# Altium PCB Glucometer-E.C.- Full V1.1.PcbDoc
Units mm, origin at the board's own origin, x right, y up, seen from the top; angles counter-clockwise.
Board outline 54.25 x 65.25 mm, 2 copper layers (Top Layer, Bottom Layer); 54 components, 58 nets, 244 pads, 35 vias.
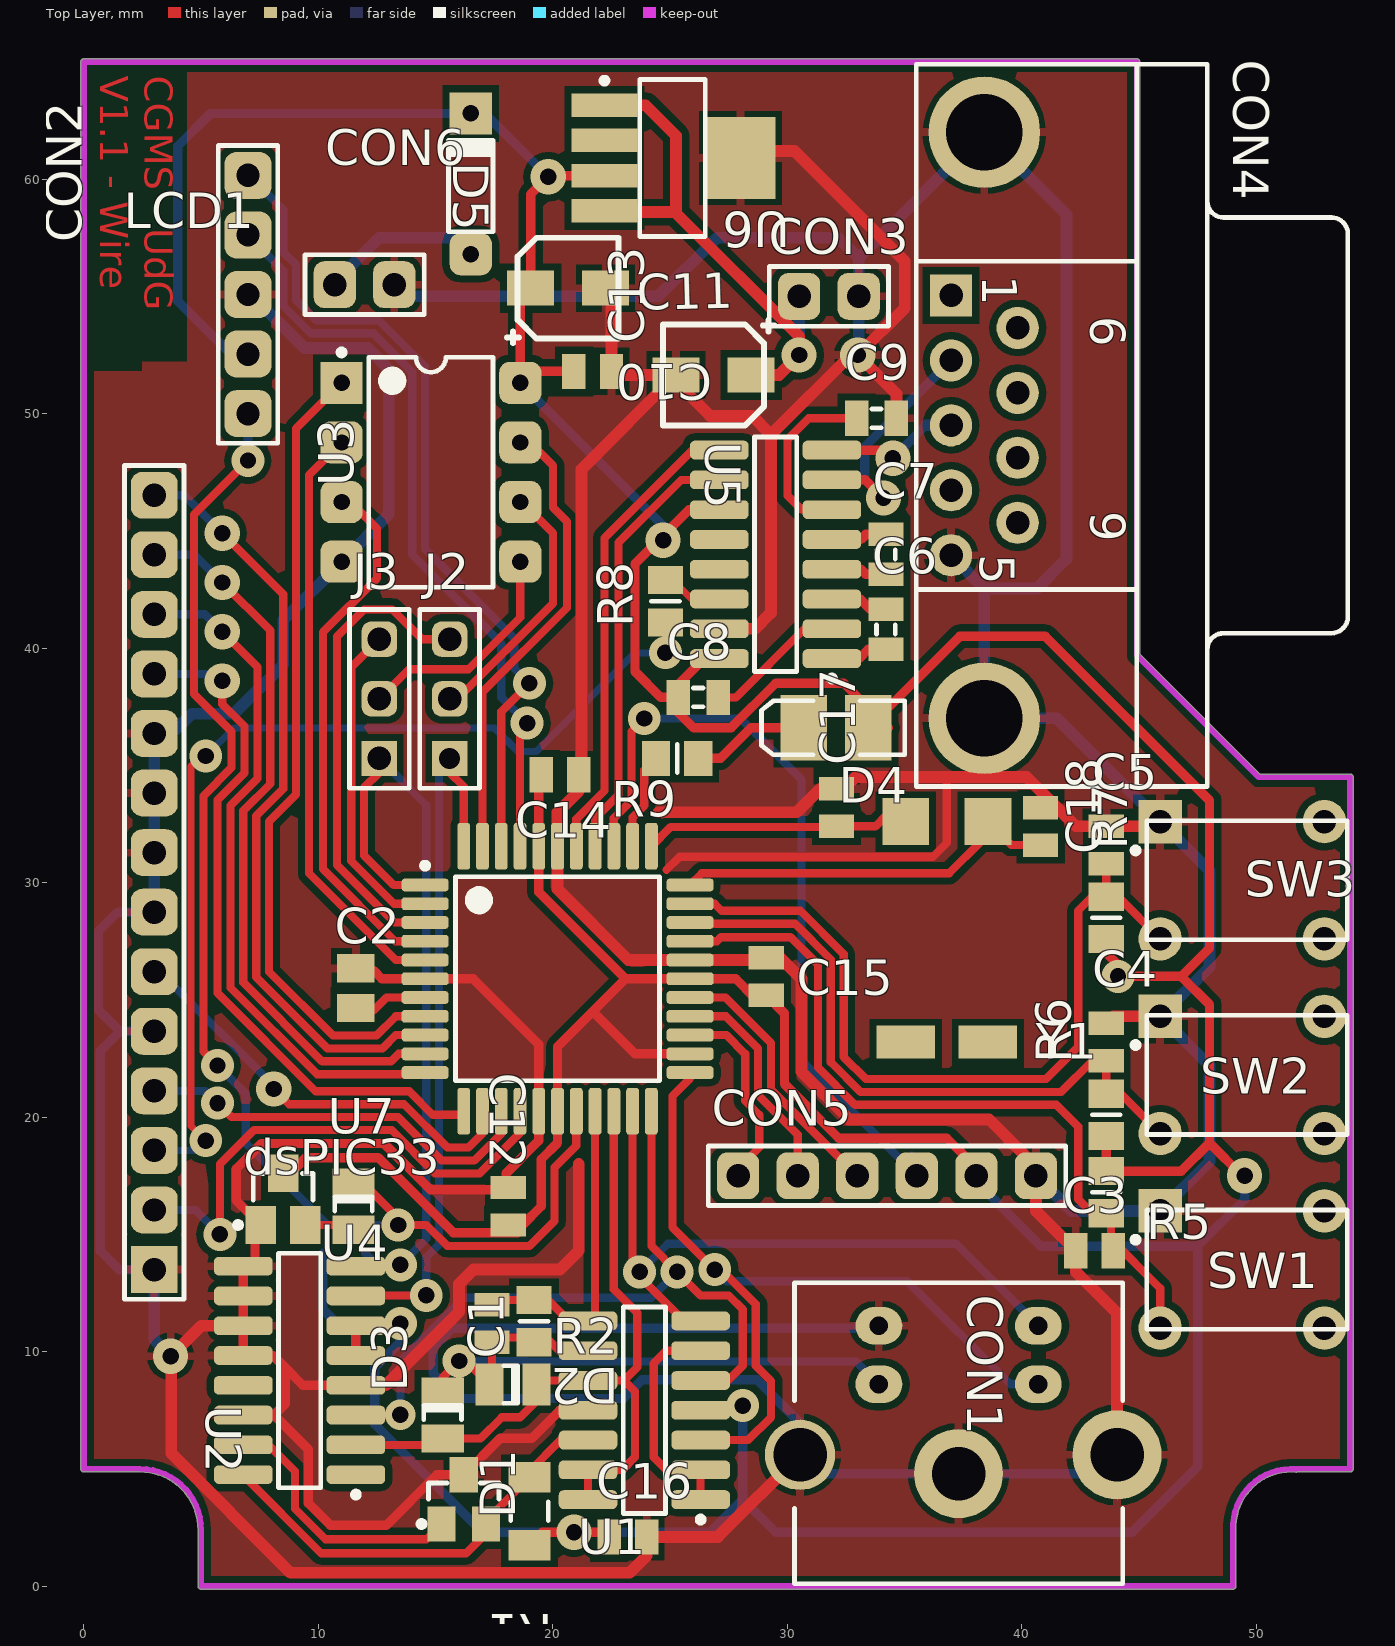
[diagram p0: Top Layer view]
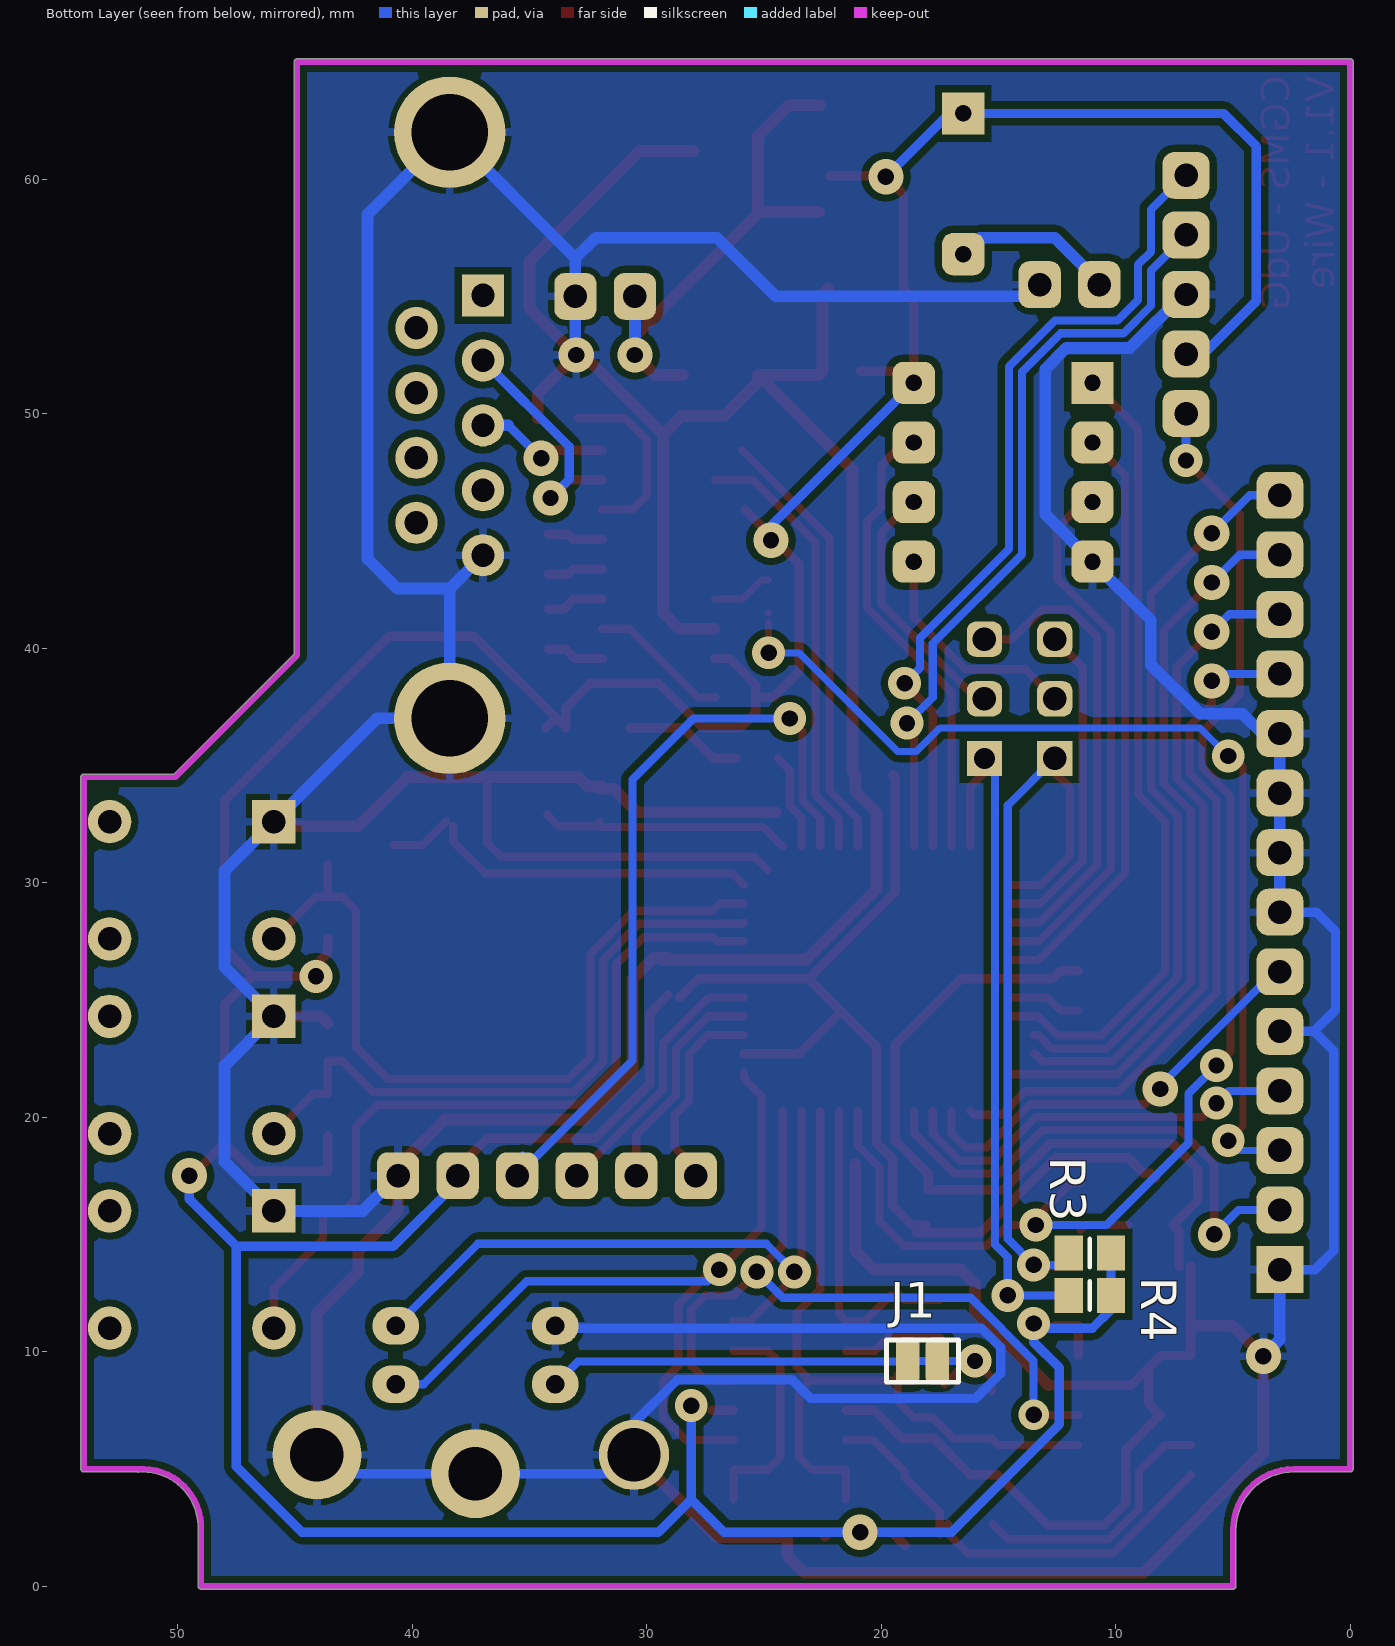
[diagram p1: Bottom Layer view, seen from below]

## Layer stack, top to bottom
Top Layer: signal copper 0.0356
Dielectric: dielectric 0.32, FR-4, Dk 4.8
Bottom Layer: signal copper 0.0356

## Board outline
4.873,0 4.873,2.4 ccw(c2.4,2.4) 2.4,4.873 0,4.873 cw(c0,5) -0.127,5 -0.127,65 cw(c0,65) 0,65.127 44.9,65.127 cw(c44.9,65) 45.027,65 45.027,39.753 50.153,34.627 54,34.627 cw(c54,34.5) 54.127,34.5 54.127,5 cw(c54,5) 54,4.873 51.742,4.873 cw(c51.697,4.992) 51.687,4.865 ccw(c51.498,2.5) 49.127,2.597 49.127,0 cw(c49,0) 49,-0.127 5,-0.127 cw(c5,0)

## Design rules (kind name [scope] priority, off if disabled: settings)
Clearance [All] p1: gap=0.2
PlaneConnect [All] p1: planeconnectstyle=Relief reliefexpansion=0.5 reliefentries=4 reliefconductorwidth=0.3 reliefairgap=0.25
PolygonConnect [All] p1: connectstyle=Relief reliefconductorwidth=0.35 reliefentries=4 polygonreliefangle="90 Angle" airgapwidth=0.25
RoutingVias [All] p1: holewidth=0.7 width=1.5 viastyle="Through Hole" minholewidth=0.6 minwidth=1.27 maxholewidth=1 maxwidth=2
SolderMaskExpansion [All] p1: expansion=0.102
Width [All] p1: maxlimit=5 minlimit=0.25 preferedwidth=0.35 minimp=50.000000 maximp=50.000000 favimp=50.000000
27 further rules are at their usual default settings.

## Components (designator, comment, footprint, x,y, rotation, side; value= is the part's Value field where it differs from the comment)
C1 "Cap2" CAPC1608N 17.4,11.2 r90 top
C2 "Cap" CAPC2012N 11.6,25.5 r270 top
C3 "Cap" CAPC1608N 43.1,14.3 r0 top
C4 "Cap" CAPC1608N 43.6,23.2 r270 top
C5 "Cap" CAPC1608N 43.6,31.6 r270 top
C6 "Cap" RESC1608N 34.2,40.8 r90 top
C7 "Cap" RESC1608N 34.2,44 r90 top
C8 "Cap" RESC1608N 26.2,37.9 r0 top
C9 "Cap" RESC1608N 33.8,49.8 r0 top
C10 "Cap Pol2" C-4x4 24.7,49.5 r0 top
C11 "Cap Pol2" C-4x4 22.8,57.5 r180 top
C12 "Cap" CAPC1608N 18.1,16.2 r270 top
C13 "Cap" CAPC1608N 21.7,51.8 r180 top
C14 "Cap" CAPC1608N 20.3,34.6 r180 top
C15 "Cap" CAPC1608N 29.1,26 r270 top
C16 "Cap" CAPC1608N 23.2,2.1 r180 top
C17 "Cap" CAPC1608N 32.1,33.2 r270 top
C18 "Cap" CAPC1608N 40.8,32.4 r270 top
CON1 "" CDIN2.6-3H4A 37.3,0.1 r90 top
CON2 "Header 5" HDR1X5 7,50 r90 top
CON3 "Header 2" HDR1X2 30.5,55 r0 top
CON4 "D Connector 9" DSUB1.385-2H9 47.9,49.5 r270 top
CON5 "Header 6" HDR1X6 27.9,17.5 r0 top
CON6 "Header 2" HDR1X2 10.7,55.5 r0 top
D1 "1N4148" CD3216-1206#1 15.3,7.4 r90 top
D2 "1N4148" CD3216-1206#2 18.2,8.6 r0 top
D3 "1N4148" CD3216-1206#1 11.5,16.3 r90 top
D4 "LED2" 3.2X1.6X1.1 32.1,36.6 r180 top
D5 "1N4148" DO-35 16.5,59.7 r90 top
dsPIC33 "DSPIC33FJ64MC804-I/PT" TQFP-PT44_N 20.2,25.9 r0 top
J1 "MHDR1X2" MHDR1X2 17.6,9.6 r0 bottom
J2 "Header 3" HDR1X3#1 15.6,35.3 r90 top
J3 "Header 3" HDR1X3#2 12.6,35.3 r90 top
LCD1 "162A" HDR1X14 3,13.5 r90 top locked
R1 "Res1" RESC3216N 19,3.2 r270 top
R2 "Res1" RESC2012N 19.2,11.3 r270 top
R3 "Res1" RESC2012N 11.1,12.4 r0 bottom
R4 "Res1" RESC2012N 11.1,14.2 r0 bottom
R5 "Res1" RESC2012N 43.6,16.8 r90 top
R6 "Res1" RESC2012N 43.6,20.1 r270 top
R7 "Res1" RESC2012N 43.6,28.5 r270 top
R8 "Res1" RESC2012N 24.8,42 r90 top
R9 "Res1" RESC2012N 25.3,35.3 r0 top
SW1 "SW-PB" DPST-4 49.6,13.5 r0 top
SW2 "SW-PB" DPST-4 49.6,21.8 r0 top
SW3 "SW-PB" DPST-4 49.6,30.1 r0 top
U1 "LMC6044IN" M14A_N 23.9,7.5 r180 top
U2 "LM4041CEM3-ADJ/NOPB" MF03A_N 16.2,3.7 r90 top
U3 "24LC1025-E/P" PDIP300-P8 14.8,47.5 r0 top
U4 "AD5242" R-16N_N 9.2,9.2 r180 top
U5 "MAX3232CSE" NSO16_N 29.5,44 r180 top
U6 "LP38693MP-3.3/NOPB" MP05A_N 25.1,60.9 r0 top
U7 "Supply Voltage Supervisor" SOT23 8.5,16.5 r0 top
Y1 "ECS-240-20-7S" ECX-3S 36.8,27.9 r270 top

## Footprints (in the part's own frame and the unit in brackets; to place one, negate y for a bottom-side part, rotate by r counter-clockwise, add the part's x,y. Pads: shape width x height; smd on the part's side, far side on the other; paste and mask are expansions set on the pad)
3.2X1.6X1.1 [mm] "SMT LED; 2 Flat Leads"
  rect 2x2.8 smd: 1(-1.35,0) 2(1.4,0)
  silkscreen extent -2.9,-1.15 3.2,1.15
C-4x4 [mm] "SMD Polar Aluminium Capacitor, 4x4mm, 10V"
  rect 2x1.5 smd: 1(3.75,2.15) 2(0.55,2.15)
  silkscreen extent 0,0 4.75,4.5, body extent 0,0 4.3,4.3, height 5.4
CAPC1608N [mm] "Chip Capacitor, Body 1.6x0.8mm, IPC Medium Density"
  rect 1x1.5 smd: 1(-0.8,0) 2(0.8,0)
  body extent -0.87,-0.48 0.87,0.48, height 0.85
CAPC2012N [mm] "Chip Capacitor, Body 2.0x1.3mm, IPC Medium Density"
  rect 1.2x1.6 smd: 1(-0.85,0) 2(0.85,0)
  body extent -1.1,-0.72 1.1,0.72, height 1.1
CD3216-1206#1 [mm] "Chip Diode; Body 3.2 x 1.6 mm (LxW typ)"
  rect 1.2x1.8 smd: 1(-1.1,0) 2(0.9,0)
  silkscreen extent -0.3,-0.8 0.3,0.8
CD3216-1206#2 [mm] "Chip Diode; Body 3.2 x 1.6 mm (LxW typ)"
  rect 1.2x1.8 smd: 1(-0.9,0) 2(1.1,0)
  silkscreen extent -0.3,-0.8 0.3,0.8
CDIN2.6-3H4A [mm] "Connector; Circular DIN, Thru-Hole; 4 Position; Right Angle; Pitch 2.1/2.6 mm; Body 14 x 12.84 x 13 mm (WxTxH), Shielded, Special PCB Retention"
  oval 1.6x2 hole 0.8: 1(8.51,-3.4) 2(8.51,3.4) 3(11,-3.4) 4(11,3.4)
  round 3.8 hole 2.28: MH1(5.5,-6.76) MH2(4.7,0)
  round 3 hole 2.28: MH3(5.5,6.76)
  silkscreen extent 0,-7 12.84,7, body extent 0,-7 12.84,7, height 13
DO-35 [mm] "Diode, Axial; Body 3.8 x 1.9 mm (LxDia. max), Lead Dia. 0.53 mm (max)"
  rrect50% 1.8x1.8 hole 0.7: 1(-2.9,0)
  rect 1.8x1.8 hole 0.7: 2(3.1,0)
  silkscreen extent -1.95,-0.95 2.05,0.95
DPST-4 [mm] "Switch; 4 Leads"
  rect 1.85x1.85 hole 1: 1(-3.7,2.5)
  round 1.85 hole 1: 2(-3.7,-2.5) 3(3.3,-2.5) 4(3.3,2.5)
  silkscreen extent -4.88,-2.54 4.28,2.54
DSUB1.385-2H9 [mm] "Connector; D Subminiature; 9 Position; Right Angle; Pitch 1.385 mm"
  rect 1.8x1.8 hole 1: 1(-5.54,-10.92)
  round 1.8 hole 1: 2(-2.77,-10.92) 3(0,-10.92) 4(2.77,-10.92) 5(5.54,-10.92) 6(-4.155,-8.08) 7(-1.385,-8.08) 8(1.385,-8.08) 9(4.155,-8.08)
  round 4.76 hole 3.26: 10(-12.495,-9.5) 11(12.495,-9.5)
  silkscreen extent -15.4,-12.4 15.4,6
ECX-3S [mm] "Quartz Crystal, SM; 4 Leads; Body 12.5 x 4.6 x 3.7 mm (LxWxH)"
  rect 2x2 smd: 1(-4.7,-1.75) 4(-4.7,1.75)
  rect 1.4x2.5 smd: 2(4.7,-1.75) 3(4.7,1.75)
HDR1X2 [mm] "Connector; Header; 2 Position"
  rrect50% 1.8x2 hole 1: 1(0,0) 2(2.54,0)
  silkscreen extent -1.27,-1.27 3.81,1.27
HDR1X3#1 [mm] "Connector; Header; 3 Position"
  rect 1.5x1.5 hole 0.9: 1(0,0)
  rrect50% 1.5x1.5 hole 1: 2(2.54,0) 3(5.08,0)
  silkscreen extent -1.27,-1.27 6.35,1.27
HDR1X3#2 [mm] "Connector; Header; 3 Position"
  rect 1.5x1.5 hole 1: 1(0,0)
  rrect50% 1.5x1.5 hole 1: 2(2.54,0) 3(5.08,0)
  silkscreen extent -1.27,-1.27 6.35,1.27
HDR1X5 [mm] "Connector; Header; 5 Position"
  rrect50% 2x2 hole 1: 1(0,0) 2(2.54,0) 3(5.08,0) 4(7.62,0) 5(10.16,0)
  silkscreen extent -1.27,-1.27 11.43,1.27
HDR1X6 [mm] "Connector; Header; 6 Position"
  rrect50% 1.8x2 hole 1: 1(0,0) 2(2.54,0) 3(5.08,0) 4(7.62,0) 5(10.16,0) 6(12.7,0)
  silkscreen extent -1.27,-1.27 13.97,1.27
HDR1X14 [mm] "Connector; Header; 14 Position"
  rect 2x2 hole 1: 1(0,0)
  rrect50% 2x2 hole 1: 2(2.54,0) 3(5.08,0) 4(7.62,0) 5(10.16,0) 6(12.7,0) 7(15.24,0) 8(17.78,0) 9(20.32,0) 10(22.86,0) 11(25.4,0) 12(27.94,0) 13(30.48,0) 14(33.02,0)
  silkscreen extent -1.27,-1.27 34.29,1.27
M14A_N [mm] "SOIC, 14-Leads, Body 8.6x3.9mm, Pitch 1.27mm, IPC Medium Density"
  rrect50% 2.5x0.8 smd: 1(-2.4,3.81) 2(-2.4,2.54) 3(-2.4,1.27) 4(-2.4,0) 5(-2.4,-1.27) 6(-2.4,-2.54) 7(-2.4,-3.81) 8(2.4,-3.81) 9(2.4,-2.54) 10(2.4,-1.27) 11(2.4,0) 12(2.4,1.27) 13(2.4,2.54) 14(2.4,3.81)
  silkscreen extent -2.53,-4.4 0.9,4.78, body extent -2,-4.38 2,4.38, height 1.75
MF03A_N [mm] "SOT23, 3-Leads, Body 2.9x1.3mm, Pitch 0.95mm, Lead Span 2.4mm, IPC Medium Density"
  rect 1.5x1.2 smd: 1(-1.05,0.95) 2(-1.05,-0.95) 3(1.05,0)
  silkscreen extent -1.17,-1.5 0.7,1.92, body extent -0.7,-1.5 0.7,1.5, height 1.12
MHDR1X2 [mm] "Connector; Header; 2 Position"
  rrect50% 1x2 smd: 1(0,0) 2(1.27,0)
  silkscreen extent -0.9,-0.9 2.17,0.9
MP05A_N [mm] "SOT223, 5-Leads, Body 6.5x3.5mm, Pitch 1.5mm, Lead Span 7mm, IPC Medium Density"
  rect 2.8x1 smd: 1(-2.9,2.25) 2(-2.9,0.75) 3(-2.9,-0.75) 4(-2.9,-2.25)
  rect 3x3.5 smd: 5(2.9,0)
  silkscreen extent -3.02,-3.35 1.4,3.42, body extent -1.85,-3.35 1.85,3.35, height 1.8
NSO16_N [mm] "SOIC, 16-Leads, Body 9.9x3.9mm, Pitch 1.27mm, IPC Medium Density"
  rrect50% 2.5x0.8 smd: 1(-2.4,4.445) 2(-2.4,3.175) 3(-2.4,1.905) 4(-2.4,0.635) 5(-2.4,-0.635) 6(-2.4,-1.905) 7(-2.4,-3.175) 8(-2.4,-4.445) 9(2.4,-4.445) 10(2.4,-3.175) 11(2.4,-1.905) 12(2.4,-0.635) 13(2.4,0.635) 14(2.4,1.905) 15(2.4,3.175) 16(2.4,4.445)
  silkscreen extent -2.53,-5 0.9,5.42, body extent -2,-5 2,5, height 1.75
PDIP300-P8 [mm] "DIP, 8-Leads, Row Spacing 7.62mm, Pitch 2.54mm, Body 9.5x6.6mm"
  rect 1.8x1.8 hole 0.7: 1(-3.81,3.81)
  rrect50% 1.8x1.8 hole 0.7: 2(-3.81,1.27) 3(-3.81,-1.27) 4(-3.81,-3.81) 5(3.81,-3.81) 6(3.81,-1.27) 7(3.81,1.27) 8(3.81,3.81)
  silkscreen extent -3.93,-4.9 2.65,5.23, body extent -3.55,-4.9 3.55,4.9, height 5.34
R-16N_N [mm] "16-Pin Small Outline Integrated Circuit 1.27 mm Pitch, IPC Medium Density"
  rrect50% 2.5x0.8 smd: 1(-2.4,4.445) 2(-2.4,3.175) 3(-2.4,1.905) 4(-2.4,0.635) 5(-2.4,-0.635) 6(-2.4,-1.905) 7(-2.4,-3.175) 8(-2.4,-4.445) 9(2.4,-4.445) 10(2.4,-3.175) 11(2.4,-1.905) 12(2.4,-0.635) 13(2.4,0.635) 14(2.4,1.905) 15(2.4,3.175) 16(2.4,4.445)
  silkscreen extent -2.53,-5 0.9,5.42, body extent -1.95,-4.95 1.95,4.95, height 1.75
RESC1608N [mm] "Chip Resistor, Body 1.6x0.8mm, IPC Medium Density"
  rect 1x1.5 smd: 1(-0.85,0) 2(0.85,0)
  silkscreen extent -0.2,-0.4 0.2,0.4, body extent -0.85,-0.48 0.85,0.48, height 0.6
RESC2012N [mm] "Chip Resistor, Body 2.0x1.3mm, IPC Medium Density"
  rect 1.2x1.5 smd: 1(-0.9,0) 2(0.9,0)
  silkscreen extent 0,-0.6 0,0.6, body extent -1.07,-0.7 1.07,0.7, height 0.65
RESC3216N [mm] "Chip Resistor, Body 3.2x1.6mm, IPC Medium Density"
  rect 1.3x1.8 smd: 1(-1.45,0) 2(1.45,0)
  silkscreen extent -0.4,-0.8 0.4,0.8, body extent -1.68,-0.87 1.68,0.87, height 0.71
SOT23 [mm] "SOT-23; 3 Leads; Body 3.0 x 2.6 mm, inc. leads (LxW max)"
  rect 1.3x1.6 smd: 1(-0.95,-1.1) 2(0.95,-1.1) 3(0,1.1)
  silkscreen extent -2.05,-1.22 1.28,1.1
TQFP-PT44_N [mm] "Thin QFP, 44-Leads, Body 10x10mm, Pitch 0.8mm, IPC Medium Density"
  rrect50% 2x0.55 smd: 1(-5.65,4) 2(-5.65,3.2) 3(-5.65,2.4) 4(-5.65,1.6) 5(-5.65,0.8) 6(-5.65,0) 7(-5.65,-0.8) 8(-5.65,-1.6) 9(-5.65,-2.4) 10(-5.65,-3.2) 11(-5.65,-4) 23(5.65,-4) 24(5.65,-3.2) 25(5.65,-2.4) 26(5.65,-1.6) 27(5.65,-0.8) 28(5.65,0) 29(5.65,0.8) 30(5.65,1.6) 31(5.65,2.4) 32(5.65,3.2) 33(5.65,4)
  rrect50% 0.55x2 smd: 12(-4,-5.65) 13(-3.2,-5.65) 14(-2.4,-5.65) 15(-1.6,-5.65) 16(-0.8,-5.65) 17(0,-5.65) 18(0.8,-5.65) 19(1.6,-5.65) 20(2.4,-5.65) 21(3.2,-5.65) 22(4,-5.65) 34(4,5.65) 35(3.2,5.65) 36(2.4,5.65) 37(1.6,5.65) 38(0.8,5.65) 39(0,5.65) 40(-0.8,5.65) 41(-1.6,5.65) 42(-2.4,5.65) 43(-3.2,5.65) 44(-4,5.65)
  silkscreen extent -5.77,-4.35 4.35,4.95, body extent -5,-5 5,5, height 1.2

## Part data
C1 C2 C3 C4 C5 C6 C7 C8 C9 C12 C13 C14 C15 C16 C17 C18: "Capacitor"
C10 C11: "Polarized Capacitor (Axial)"
CON1: library part "MiniDin 4Pins - SuperVideo", "MiniDin 4 Pins"
CON2: "Header, 5-Pin"
CON3 CON6 J1: "Header, 2-Pin"
CON4: "Receptacle Assembly, 9 Position, Right Angle"
CON5: "Header, 6-Pin"
D1 D2 D3 D5: "High Conductance Fast Diode"
D4: "Typical RED, GREEN, YELLOW, AMBER GaAs LED"
dsPIC33: "High-Performance 16-bit Digital Signal Controller, 64 KB Flash, 16 KB RAM, 44-Pin TQFP, Industrial Temperature"
J2 J3: "Header, 3-Pin"
LCD1: "16 char * 2 line LCD character display with b/light"
R1 R2 R3 R4 R5 R6 R7 R8 R9: "Resistor"
SW1 SW2 SW3: "Switch"
U1: "CMOS Quad Micropower Operational Amplifier, 14-pin MDIP"
U2: "Precision Micropower Shunt Voltage Reference, 3-pin SOT-23, Pb-Free"
U3: "1 Mbit, 400kHz, 2.5V, I2C Serial EEPROM, 8-Pin PDIP, Extended Temperature"
U4: "AD5242BR"
U5: "3.0V TO 5.5V, Low-Power, up to 1Mbps, True RS-232 Transceiver Using Four 0.1µF External Capacitor"
U6: "500mA Low Dropout CMOS Linear Regulators Stable with Ceramic Output Capacitors, 5-pin SOT-223, Pb-Free"
Y1: "Crystal Oscillator"

## Via types
v1: diameter 1.4, hole 0.7, Top Layer to Bottom Layer, 19 vias
v2: diameter 1.5, hole 0.7, Top Layer to Bottom Layer, 14 vias
v3: diameter 1.3, hole 0.7, Top Layer to Bottom Layer, 1 vias
v4: diameter 1.4, hole 0.7, Top Layer to Bottom Layer, tented bottom, 1 vias

## Nets (pads, with @x,y where several pads share a name; then routed paths per layer and width w, separated by ;. In a path a pad name is that pad's centre, name@x,y a point inside that pad or via, vN(x,y) a via of type N, cw(c..) or ccw(c..) an arc to the next point about the centre after c; other vN are vias at no path point)
3.3V: C8.1 C11.1 C12.2 C13.2 C14.2 C15.2 C16.2 CON2.2 CON5.5 D4.1 D5.2 dsPIC33.17 dsPIC33.24 dsPIC33.28 dsPIC33.40 R1.2 R3.1 R4.1 R5.2 R6.2 R7.2 U1.4 U3.8 U4.5 U4.6 U5.11 U5.16 U6.3 U7.3 | length 269.8
  Top Layer w0.4: U7.3@8.3,17.4 U7.3 8.8,17.6 9.475,18.275 12.556,18.275 15.756,15.075 C12.2@18.5,15.075 ; U4.5 U4.6 U4.6@12.605,11.105 ; C12.2 18.7,15.4 19.5,16.2 19.5,18.2 20.2,18.9 dsPIC33.17 20.2,23 21.7,24.5 ; R1.2 19.55,2.3 v2(20.9,2.3) 22.2,2.3 C16.2 ; C14.2 19.4,34.5 dsPIC33.40 19.4,29.6 23.1,25.9 ; C13.2 19.1,51.8 U3.8 18.61,54.91 C11.1 19.05,59.35 v2(19.8,60.1) 19.85,60.15 U6.3 ; v2@24.6,44.7 25.805,45.905 ; v2(24.7,44.6) 24.5,44.6 23.5,43.6 23.5,39 24.6,37.9 C8.1 ; dsPIC33.24 23.5,22.7 21.7,24.5 ; U1.4 U1.4@27.2,7.5 ; U5.16 26.455,39.555 25.35,38.45 C8.1 ; C15.2@28.6,25.1 27.8,25.9 dsPIC33.28 23.1,25.9 ; C15.2 29.875,24.425 29.875,21.418 32.193,19.1 36.8,19.1 37.56,18.34 CON5.5@37.56,17.5 ; D4.1@33.875,37.025 D4.1@34.3,36.6 ; CON5.5@38.06,16.724 CON5.5 ; R6.2 R5.2 46.8,17.7 48,18.9 ; R7.2 43.6,27 44.6,26 46.8,26 ; v1@44.4,25.7 v1@44.7,26 ; v2(49.5,17.5) 49.4,17.5 48,18.9 ; 21.7,24.5 23.1,25.9 ; C8.1 25.35,37.25 26,36.6 27.6,36.6 29.5,38.5 32.4,38.5 33.45,37.45 D4.1 37.35,40.5 41,40.5 48,33.5 48,27.2 46.8,26 ; 46.8,26 48,24.8 48,18.9
  Bottom Layer w0.4: CON2.2 6.26,52.54 4,54.8 4,61.4 5.4,62.8 D5.2 17.1,62.8 v2(19.8,60.1) ; R4.1 R3.1 10.2,11.8 11,11 13.3,11 v1(13.5,11.2) 13.5,10.413 12.4,9.313 12.4,6.9 17,2.3 v2(20.9,2.3) 26.7,2.3 28.1,3.7 ; U3.8 24.7,45.22 v2(24.7,44.6) ; v4(28.1,7.7) 28.1,3.7 ; CON5.5@37.56,17.26 CON5.5@37.56,17.5 ; CON5.5 38.06,17.24 40.8,14.5 47.5,14.5 ; v2(49.5,17.5) 49.5,16.5 47.5,14.5 ; 28.1,3.7 29.5,2.3 44.7,2.3 47.5,5.1 47.5,14.5
  other v1: 44.1,26
-V: R8.2 U5.14 | length 2.6
  Top Layer w0.3: R8.2 25.1,42.9 25.905,42.095 U5.14
BTN_D: C5.2 dsPIC33.32 R7.1 SW3.2 | length 34.5
  Top Layer w0.35: dsPIC33.32 26.9,29.1 27.2,28.8 30.556,28.8 32.4,26.956 32.4,22.572 33.347,21.625 41.025,21.625 42.4,23 42.4,28.8 43,29.4 R7.1 ; C5.2 R7.1 ; SW3.2 44.1,29.4 R7.1
BTN_E: C4.2 dsPIC33.31 R6.1 SW2.2 | length 28.3
  Top Layer w0.35: dsPIC33.31 25.9,28.25 30.328,28.25 31.85,26.728 31.85,22.344 33.119,21.075 41.675,21.075 43,22.4 C4.2 R6.1 44.2,21 SW2.2
BTN_U: C3.2 dsPIC33.30 R5.1 SW1.2 | length 32.9
  Top Layer w0.35: dsPIC33.30 27,27.5 27.175,27.675 30.125,27.675 31.3,26.5 31.3,22.116 32.891,20.525 41.475,20.525 42.4,19.6 42.4,16.5 43,15.9 R5.1 43.8,15.7 43.8,14.8 45.9,12.7 SW1.2
CNT: CON1.3 dsPIC33.21 U1.7 | length 29.8
  Top Layer w0.35: v1@23.4,13.5 dsPIC33.21 ; v1@23.6,13.3 v1@24,12.9 ; v1(23.7,13.4) 23.7,13.2 25.59,11.31 U1.7
  Bottom Layer w0.35: v1(23.7,13.4) 24.9,14.6 37.2,14.6 CON1.3
DB4: dsPIC33.12 LCD1.11 | length 29.5
  Top Layer w0.35: v2(5.9,38.6) 5.9,37.618 6.85,36.668 6.85,34.672 5.7,33.522 5.7,25.289 9.889,21.1 13.878,21.1 14.878,20.1 16.05,20.1 dsPIC33.12
  Bottom Layer w0.35: LCD1.11 v2@5.6,38.9
DB5: dsPIC33.11 LCD1.12 | length 29.3
  Top Layer w0.35: v2(5.9,40.7) 7.4,39.2 7.4,34.444 6.25,33.294 6.25,25.517 9.937,21.83 14.48,21.83 dsPIC33.11
  Bottom Layer w0.35: LCD1.12 5.16,41.44 v2(5.9,40.7)
DB6: dsPIC33.10 LCD1.13 | length 30
  Top Layer w0.35: v2(5.9,42.8) 7.95,40.75 7.95,34.217 6.8,33.067 6.8,25.744 10.164,22.38 13.102,22.38 13.422,22.7 13.5,22.7
  Bottom Layer w0.35: LCD1.13 4.72,43.98 v2(5.9,42.8)
DB7: dsPIC33.9 LCD1.14 | length 31.7
  Top Layer w0.35: v2(5.9,44.9) 8.5,42.3 8.5,33.989 7.35,32.839 7.35,25.972 10.392,22.93 12.73,22.93 13.3,23.5 13.5,23.5
  Bottom Layer w0.35: LCD1.14 4.28,46.52 v2(5.9,44.9)
E: dsPIC33.13 LCD1.6 | length 18.4
  Top Layer w0.35: v2(8.1,21.2) 8.75,20.55 13.65,20.55 15.5,18.7 16.4,18.7 17,19.3 dsPIC33.13
  Bottom Layer w0.35: LCD1.6 3.22,26.2 8.1,21.32 v2(8.1,21.2)
EXTP1: dsPIC33.8 U3.1 | length 34.5
  Top Layer w0.35: U3.1 9.05,49.37 9.05,33.761 7.9,32.611 7.9,26.2 10.62,23.48 12.48,23.48 13.3,24.3 dsPIC33.8
EXTP2: dsPIC33.5 U3.2 | length 25.4
  Top Layer w0.35: U3.2 9.6,47.38 9.6,30.4 13.3,26.7 dsPIC33.5
EXTP3: dsPIC33.4 U3.3 | length 23.1
  Top Layer w0.35: U3.3 11.37,46.23 12.5,45.1 12.5,42.978 10.2,40.678 10.2,30.578 13.278,27.5 dsPIC33.4
EXTP4: dsPIC33.43 U3.7 | length 19.1
  Top Layer w0.35: dsPIC33.43 17,38.122 20.6,41.722 20.6,45.4 20,46 20,47.78 U3.7@19.21,48.57
EXTP5: dsPIC33.3 J2.3 | length 20.3
  Top Layer w0.35: dsPIC33.3 13.256,28.3 10.8,30.756 10.8,40.5 11.95,41.65 13.15,41.65 14.42,40.38 J2.3
EXTP6: dsPIC33.2 J3.3 | length 13.9
  Top Layer w0.35: J3.3 11.4,39.18 11.4,30.933 13.233,29.1 dsPIC33.2
GND: C2.1 C3.1 C4.1 C5.1 C9.2 C10.2 C11.2 C12.1 C13.1 C14.1 C15.1 C16.1 C17.1 C18.1 CON1.4 CON1.MH1 CON1.MH2 CON1.MH3 CON2.3 CON3.2 CON4.5 CON4.10 CON4.11 CON5.6 CON6.2 dsPIC33.6 dsPIC33.16 dsPIC33.29 dsPIC33.39 LCD1.1 LCD1.5 LCD1.7 LCD1.8 LCD1.9 LCD1.10 SW1.1 SW2.1 SW3.1 U1.11 U2.3 U3.4 U4.4 U4.9 U4.10 U4.11 U4.12 U4.14 U5.15 U6.5 U7.1 | length 482.9
  Top Layer w0.3: SW1.1@46,15.5 SW1.1@46.5,16 ; SW2.1@46.4,24.1 SW2.1@46.5,24.1
  Top Layer w0.35: 24.85,30.55 25.4,31.1 36.2,31.1 36.8,31.7 36.8,34.5
  Top Layer w0.4: U4.9 U4.10 U4.11 U4.12 8.065,9.835 8.6,9.3 ; U4.9@7.3,13.645 7.3,15.15 U7.1 6.5,16.45 6.5,17.8 7.575,18.875 12.805,18.875 14.78,16.9 18,16.9 18,17.6 19.4,19 dsPIC33.16 19.4,23.1 16.6,25.9 dsPIC33.6 12.7,25.9 12.35,26.25 C2.1@11.6,26.25 ; 12.865,8.565 U4.4 9.335,8.565 8.6,9.3 ; U1.11 20.3,7.5 19.1,6.3 17.75,6.3 U2.3 15.05,4.75 12.9,2.6 10.513,2.6 9.575,3.538 9.575,5.825 8.105,7.295 8.6,7.79 8.6,9.3
  Top Layer w0.5: v2(3.7,9.8) 3.722,9.778 3.722,5.663 8.809,0.577 23.277,0.577 24,1.3 C16.1 27.04,2.1 CON1.MH3 ; v2@3.722,9.8 3.722,9.822 5.005,11.105 U4.11 ; 12.865,8.565 16,11.7 16,12.9 16.6,13.5 20.3,13.5 21.1,14.3 21.1,18 ; C11.2 22.5,55.1 C13.1 22.65,51.65 C10.2 ; 24.5,33 30.4,33 31.4,34 C17.1@32,34 ; U5.15 28.625,40.825 29.3,41.5 29.3,49.1 ; U6.5@28,61.2 30.3,61.2 35,56.5 35,54.5 v2(33,52.5) ; C15.1 29.7,26.8 30.6,25.9 30.6,21.932 32.632,19.9 38.6,19.9 40.1,18.4 CON5.6@40.1,17.5 ; C15.1@29.3,26.7 dsPIC33.29 23.219,26.7 20.2,29.719 dsPIC33.39 20.2,33 21.1,33.9 C14.1 21.225,34.725 21.225,47.625 C10.2 ; C17.1@31.9,34.1 32.5,34.1 32.9,34.5 36.8,34.5 40.2,34.5 42.3,32.4 C5.1 45.7,32.4 SW3.1 ; C9.2 34.65,50.85 v2(33,52.5) ; CON5.6 40.6,16 C3.1 42.3,13.4 44.06,11.64 CON1.MH1 ; C4.1 43.9,24.3 SW2.1 ; C10.2 25.25,51.35 26.7,49.9 28.5,49.9 29.3,49.1 ; 29.3,49.1 32.7,52.5 v2(33,52.5)
  Bottom Layer w0.4: LCD1.1 1.5,13.5 0.7,14.3 0.7,22.82 1.54,23.66 ; LCD1.5 1.54,23.66 ; LCD1.7 1.44,28.74 0.627,27.927 0.627,24.573 1.54,23.66 ; CON1.4 33.8,11 15.72,11 14.9,10.18 14.9,9.08 15.98,8 23,8 23.8,8.8 28.7,8.8 30.54,6.96 CON1.MH3 31.34,4.8 CON1.MH2 CON1.MH1@43.26,4.8
  Bottom Layer w0.5: LCD1.1 3,10.5 v2(3.7,9.8) ; LCD1.7 LCD1.8 LCD1.9 LCD1.10 3.76,36.36 4.6,37.2 6.4,37.2 8.5,39.3 8.5,41.2 U3.4 13,45.7 13,51.9 12.1,52.8 9.4,52.8 CON2.3@7,55.2 ; CON6.2 13.74,55 24.5,55 27,57.5 32.175,57.5 33.04,56.635 ; v2@33.04,52.54 CON3.2 33.04,56.635 ; CON4.5 38.4,42.54 ; CON5.6 42.1,16 SW1.1 48,18.1 48,22.2 SW2.1 48,26.4 48,30.5 41.495,37.005 CON4.11 38.4,42.54 ; 33.04,56.635 CON4.10 41.9,58.495 41.9,43.8 40.64,42.54 38.4,42.54
LCDVDD: dsPIC33.15 LCD1.2 | length 22
  Top Layer w0.35: v1(5.8,15) 5.8,18 7.25,19.45 13.13,19.45 14.98,17.6 16.878,17.6 18.6,19.322 dsPIC33.15
  Bottom Layer w0.35: LCD1.2 4.76,16.04 v1(5.8,15)
LCDVO: LCD1.3 R8.1 | length 43
  Top Layer w0.3: LCD1.3 LCD1.3@3.03,18.55 ; v1(5.2,19) 4.575,19.625 4.575,34.975 5,35.4 v1(5.2,35.4) ; v1(24.8,39.8) R8.1
  Bottom Layer w0.3: LCD1.3 4.78,18.58 v1(5.2,19) ; v1(5.2,35.4) 6.4,36.6 17.5,36.6 18.5,35.6 19.3,35.6 23.5,39.8 v1(24.8,39.8)
LED1: dsPIC33.35 R9.1 | length 4.2
  Top Layer w0.35: dsPIC33.35 23.4,32.784 23.9,33.284 23.9,34.8 R9.1
MCLR: CON2.1 D3.2 dsPIC33.18 | length 57.3
  Top Layer w0.35: v1(5.7,22.2) 5.1,22.8 5.1,33.7 6.3,34.9 6.3,36.44 4.7,38.04 4.7,45.7 v1(7,48) ; D3.2 11.9,17.2 13.4,15.7 v1(13.4,15.4) 14.6,15.4 15.5,14.5 19,14.5 20.075,15.575 20.075,17.859 21,18.784 dsPIC33.18
  Bottom Layer w0.35: v1(5.7,22.2) 6.9,21 6.9,18.9 10.4,15.4 v1(13.4,15.4)
  Bottom Layer w0.4: v1(7,48) CON2.1
NetC2_2: C2.2 dsPIC33.7 | length 3.2
  Top Layer w0.35: C2.2@11.6,24.55 12.35,24.55 12.9,25.1 dsPIC33.7
NetC6_1: C6.1 U5.1 | length 2.5
  Top Layer w0.4: U5.1 33.055,39.555 33.45,39.95 C6.1
NetC6_2: C6.2 U5.3 | length 2.5
  Top Layer w0.4: U5.3 33.105,42.095 33.55,41.65 C6.2
NetC7_1: C7.1 U5.4 | length 2.4
  Top Layer w0.4: U5.4 33.135,43.365 33.35,43.15 C7.1
NetC7_2: C7.2 U5.5 | length 2.4
  Top Layer w0.4: U5.5 33.135,44.635 33.35,44.85 C7.2
NetC8_2: C8.2 U5.2 | length 6.1
  Top Layer w0.35: C8.2 27.8,37.9 30.725,40.825 U5.2
NetC9_1: C9.1 U5.6 | length 7.9
  Top Layer w0.35: U5.6 30.595,45.905 30,46.5 30,48.9 30.9,49.8 C9.1
NetCON5_1: CON5.1 dsPIC33.25 | length 8.5
  Top Layer w0.35: dsPIC33.25 27.4,23.5 28.2,22.7 28.2,20.7 28.8,20.1 28.8,18.7 27.9,17.8 CON5.1
NetCON5_2: CON5.2 dsPIC33.26 | length 9.8
  Top Layer w0.35: dsPIC33.26 27.378,24.3 28.75,22.928 28.75,20.95 30.44,19.26 30.44,18 CON5.2@29.94,17.5
NetCON5_3: CON5.3 dsPIC33.27 | length 12.1
  Top Layer w0.35: dsPIC33.27 27.356,25.1 29.3,23.156 29.3,21.18 CON5.3@32.48,18 ; CON5.3@32.48,17.5 CON5.3@32.48,18 ; CON5.3@32.48,18.12 CON5.3@32.48,18 ; CON5.3 CON5.3@32.48,18
NetCON5_4: CON5.4 dsPIC33.36 | length 33.7
  Top Layer w0.35: dsPIC33.36 22.6,32.762 23.35,33.512 23.35,36.45 v1(23.9,37)
  Bottom Layer w0.35: v1(23.9,37) 28,37 30.6,34.4 30.6,22.42 CON5.4@35.02,18 ; CON5.4@35.02,17.5 CON5.4@35.02,18 ; CON5.4@35.3,18.36 35.02,18.08 CON5.4@35.02,18 ; CON5.4 CON5.4@35.02,18
NetCON6_1: CON6.1 D5.1 | length 7
  Bottom Layer w0.5: CON6.1 10.7,55.6 12.6,57.5 15.8,57.5 D5.1
NetD3_1: D3.1 U7.2 | length 2.1
  Top Layer w0.35: U7.2 11.3,15.4 D3.1
NetD4_2: D4.2 R9.2 | length 5
  Top Layer w0.4: R9.2 27.149,35.3 28.449,36.6 D4.2
NetU1_1: U1.1 U1.2 U1.6 | length 9.7
  Top Layer w0.35: U1.1 U1.2 24.84,4.96 24.3,5.5 24.3,9.5 24.84,10.04 U1.6
PEGC: CON2.5 dsPIC33.42 | length 35.7
  Top Layer w0.35: dsPIC33.42 17.8,37.3 v1(19,38.5)
  Bottom Layer w0.35: CON2.5@7,60.2 8.5,58.7 8.5,56.9 9.05,56.35 9.05,54.85 9.925,53.975 12.587,53.975 14.55,52.012 14.55,44.228 18.35,40.428 18.35,39.15 v1(19,38.5)
PEGD: CON2.4 dsPIC33.41 | length 32.7
  Top Layer w0.35: dsPIC33.41 18.6,36.5 v1(18.9,36.8)
  Bottom Layer w0.35: CON2.4@7,57.6 8.5,56.1 8.5,54.6 9.675,53.425 12.359,53.425 14,51.784 14,44 17.8,40.2 17.8,37.9 v1(18.9,36.8) ; v1@19.15,36.55 v1@19.2,36.6
REF: CON1.1 dsPIC33.23 U1.3 | length 36.1
  Top Layer w0.35: dsPIC33.23 25.85,21.65 25.1,20.9 25.1,15.3 v1(26.9,13.5) 27.178,13.5 28.65,12.028 28.65,9.4 29.3,8.75 29.3,7.2 28.33,6.23 U1.3
  Bottom Layer w0.35: v1(26.9,13.5) 27.4,13 35.12,13 39.51,8.61 CON1.1
RS: dsPIC33.14 LCD1.4 | length 17.5
  Top Layer w0.35: v1(5.7,20.6) 6.3,20 13.394,20 15.244,18.15 16.65,18.15 17.8,19.3 dsPIC33.14
  Bottom Layer w0.35: LCD1.4 5.18,21.12 v1(5.7,20.6)
RXD: CON4.2 U5.7 | length 10.2
  Top Layer w0.4: U5.7 33.325,47.175 v2(34.1,46.4)
  Bottom Layer w0.4: v2(34.1,46.4) 33.3,47.2 33.3,48.59 CON4.2
SCL1: dsPIC33.44 J2.1 R3.2 U4.7 | length 32.9
  Top Layer w0.35: U4.7 11.625,12.4 v1(14.6,12.4) ; J2.1 15.6,34.7 16.2,34.1 dsPIC33.44
  Bottom Layer w0.35: R3.2 v1(14.6,12.4) 14.6,14.022 15.15,14.572 15.15,34.85 J2.1
SCL1-M: J2.2 U3.6 | length 10.5
  Top Layer w0.35: J2.2 15.94,37.84 20,41.9 20,44.9 19.21,45.69 U3.6@19.21,46.03
SDA1: dsPIC33.1 J3.1 R4.2 U4.8 | length 34
  Top Layer w0.35: U4.8 13.445,13.645 v1(13.5,13.7) ; J3.1 12.6,34.7 11.95,34.05 11.95,31.161 13.211,29.9 dsPIC33.1
  Bottom Layer w0.35: R4.2 12.5,13.7 v1(13.5,13.7) 14.6,14.8 14.6,33.3 J3.1
SDA1-M: J3.2 U3.5 | length 9.9
  Top Layer w0.35: J3.2 13.86,39.1 16.4,39.1 18.61,41.31 18.61,42.89 U3.5@19.21,43.49
SOSCI: C18.2 dsPIC33.33 Y1.4 | length 16.5
  Top Layer w0.35: dsPIC33.33 26.35,30.4 36.9,30.4 38.25,31.75 Y1.4@38.25,32.4 ; Y1.4 39.55,31.6 C18.2
SOSCO: C17.2 dsPIC33.34 Y1.1 | length 10.7
  Top Layer w0.35: dsPIC33.34 25.025,32.375 31.975,32.375 C17.2@32,32.4 ; C17.2@32,32.6 32.2,32.4 33.75,32.4 Y1.1@34.25,32.9
TXD: CON4.3 U5.8 | length 5.8
  Top Layer w0.3: v2@34.155,48.445 v2(34.5,48.1)
  Top Layer w0.4: U5.8 v2@34.155,48.445
  Bottom Layer w0.4: v2(34.5,48.1) 35.9,49.5
  Bottom Layer w0.5: 35.9,49.5 CON4.3
U1RX: dsPIC33.38 U5.9 | length 18.9
  Top Layer w0.35: dsPIC33.38 21,32.717 22.2,33.917 22.2,44.7 U5.9@25.945,48.445
U1TX: dsPIC33.37 U5.10 | length 18.8
  Top Layer w0.35: dsPIC33.37 21.8,32.74 22.8,33.74 22.8,44.5 25.475,47.175 U5.10
VCTRL: dsPIC33.22 U1.5 U4.3 | length 32.8
  Top Layer w0.35: U4.3 13.495,7.295 v3(13.5,7.3) ; dsPIC33.22 24.2,14.5 v1(25.3,13.4) 26.3,12.4 27.5,12.4 28.1,11.8 28.1,9.4 27.47,8.77 U1.5
  Bottom Layer w0.35: v3(13.5,7.3) 13.5,9.6 16.2,12.3 24.2,12.3 v1(25.3,13.4)
VDD: C10.1 CON3.1 U6.1 U6.4 | length 22.2
  Top Layer w0.5: U6.1@22.6,63.15 23.95,63.15 25.25,61.85 25.25,58.55 30.5,53.3 v2(30.5,52.5) 29.65,51.65 C10.1 ; U6.4@22.65,58.6 25.25,58.6
  Bottom Layer w0.5: v2(30.5,52.5) CON3.1
VGND: D1.1 D2.2 dsPIC33.20 U1.10 U1.13 U1.14 U4.2 | length 32.2
  Top Layer w0.35: U4.2 15.025,6.025 D1.1 16.92,6.3 17.82,7.2 18.6,7.2 19.3,7.9 D2.2 ; D2.2@19.3,8.7 D2.2@19.3,9 ; D2.2@19.43,8.77 U1.10 23.03,8.77 ; U1.14 U1.13 22.96,4.96 23.5,5.5 23.5,8.3 23.03,8.77 ; dsPIC33.20 22.6,12.649 23.6,11.649 23.6,9.34 23.03,8.77
VOUT: C1.2 dsPIC33.19 R2.1 U1.8 | length 13.6
  Top Layer w0.35: C1.2@17.5,12.2 19,12.2 19.2,12.4 19.6,12.4 20.69,11.31 U1.8 21.8,11.61 dsPIC33.19
VREFH: R1.1 U1.12 U2.2 U4.16 | length 18.9
  Top Layer w0.35: U4.16 6.8,4.722 10.122,1.4 16.3,1.4 17.15,2.25 U2.2 ; U2.2@17.5,2.2 17.5,3.15 R1.1 19,4.9 20.33,6.23 U1.12
VREFW: U2.1 U4.15 | length 11.3
  Top Layer w0.35: U4.15 7.875,6.025 9,4.9 9,3.3 10.3,2 14.6,2 U2.1
WRK: C1.1 CON1.2 D1.2 D2.1 J1.1 J1.2 R2.2 U1.9 | length 27.7
  Top Layer w0.35: D1.2 15.3,8.9 v1(16,9.6) 16.3,9.6 D2.1 ; D2.1@17.4,8.8 17.4,10.5 17.5,10.6 19.7,10.6 20.26,10.04 U1.9
  Bottom Layer w0.35: v1(16,9.6) J1.1 J1.2 ; J1.2@18.87,9.575 32.935,9.575 CON1.2
pads on no net: CON4.1 CON4.4 CON4.6 CON4.7 CON4.8 CON4.9 SW1.3 SW1.4 SW2.3 SW2.4 SW3.3 SW3.4 U4.1 U4.13 U5.12 U5.13 U6.2 Y1.2 Y1.3

## Polygon pours and split planes (outlines as drawn)
3.3V on Top Layer "Bottom Layer-No Net" (solid, pour order 5): 20.2,20.25 20.2,23 23.1,25.9 25.85,25.9 25.85,22.7 25.85,20.2
GND on Top Layer "Bottom Layer-No Net" (solid, pour order 4): 0,65 44.9,65 44.9,39.7 50.1,34.5 54,34.5 54,5 51,5 50.5,5 49,3.5 49,0 5,0 5,3 3,5 0,5
GND on Bottom Layer "Bottom Layer-No Net" (solid, pour order 6): 0,65 44.9,65 44.9,39.7 50.1,34.5 54,34.5 54,5 51.5,5 51,5 49,3 49,0 5,0 5,2.7 5,3 3,5 2.9,5.1 0,5.1

## Keep-outs
Keep-Out Layer:
  lines w0.254: 49,2.4 cw(c51.498,2.5) 51.697,4.992 ; 49,2.6 49,0 5,0 5,2.4 ccw(c2.4,2.4) 2.4,5 0,5 0,65 44.9,65 44.9,39.7 50.1,34.5 54,34.5 54,5 51.699,5

## Other copper
Top Layer:
  text "V1.1 - Wire" at 0.7,64.4 h1.2 r270
  text "CGMS - UdG" at 2.6,64.4 h1.2 r270

## Text inside footprints (layer, text, board x,y; h text height)
CON1: Mechanical 1 "PCB Edge" at 44,0.7 h0.25 r180
CON4: Top Overlay "6" at 42.925,54.155 h1.5 r270; Top Overlay "9" at 42.925,45.845 h1.5 r270; Top Overlay "5" at 38.2,44 h1.5 r270; Top Overlay "1" at 38.3,55.9 h1.5 r270